# EAGLE board Cool Snaget-Lappi (EAGLE 9.7.0)

Size 135.71 x 119.64 mm. Coordinates in mm from the lower left corner, seen from the top.
Outline: 0,0 135.71,0 135.71,119.64 0,119.64 0,0
Copper layers (1*16): Top 0.035mm / dielectric 1.5mm / Bottom 0.035mm
Design rules "default": minimum track width 6mil, minimum drill 0.35mm, track to track 6mil, track to pad 6mil, pad to pad 6mil, via to via 6mil, smd to smd 6mil, copper to edge 40mil, drill to drill 6mil, minimum pad ring 10mil, minimum via ring 8mil, stop-mask expansion 4mil, vias tented up to drill 0mil, thermal gap 10mil

## Footprints (pad centres in the part's own frame; a part is rotated, then mirrored left to right if it is on the bottom)
LEDRD254W60D565H860B = drill 0.981 pad 1.581: 1 -1.27,0; 2 1.27,0
RESAD1016W63L850D250B = drill 0.83 pad 1.43: 1 -5.08,0; 2 5.08,0
SWITCH-MOMENTARY-PTH-6.5MM = drill 1.016 pad 1.88: 1 -3.251,2.261; 2 3.251,2.261; 3 -3.251,-2.261; 4 3.251,-2.261
ARDUINO-UNO-R3-SHIELD = drill 1.016 pad 1.88: 3.3V 24.13,-2.54; 5V 24.13,0; A0 24.13,12.7; A1 24.13,15.24; A2 24.13,17.78; A3 24.13,20.32; A4 24.13,22.86; A5 24.13,25.4; AREF -24.13,-13.97; D2 -24.13,20.32; D3 -24.13,17.78; D4 -24.13,15.24; D5 -24.13,12.7; D6 -24.13,10.16; D7 -24.13,7.62; D8 -24.13,3.81; D9 -24.13,1.27; D10 -24.13,-1.27; D11 -24.13,-3.81; D12 -24.13,-6.35; D13 -24.13,-8.89; GND@0 24.13,2.54; GND@1 24.13,5.08; GND@2 -24.13,-11.43; IOREF 24.13,-7.62; NC 24.13,-10.16; RES 24.13,-5.08; RX -24.13,25.4; SCL -24.13,-19.05; SDA -24.13,-16.51; TX -24.13,22.86; VIN 24.13,7.62

## Placement (x,y rotation side)
D3  RED  [LEDRD254W60D565H860B]  107.79,111.73 180 top
D5  RED  [LEDRD254W60D565H860B]  117.95,111.73 180 top
D6  RED  [LEDRD254W60D565H860B]  128.11,111.73 180 top
R1  10k  [RESAD1016W63L850D250B]  65.88,96.49 0 top
R3  10k  [RESAD1016W63L850D250B]  78.58,93.95 0 top
R6  10k  [RESAD1016W63L850D250B]  91.28,96.49 0 top
R7  220  [RESAD1016W63L850D250B]  129.38,104.11 90 top
R8  220  [RESAD1016W63L850D250B]  119.22,104.11 90 top
R9  220  [RESAD1016W63L850D250B]  109.06,104.11 90 top
S1  SWITCH_MOMENTARY  [SWITCH-MOMENTARY-PTH-6.5MM]  58.26,105.38 90 top
S2  SWITCH_MOMENTARY  [SWITCH-MOMENTARY-PTH-6.5MM]  70.96,105.38 90 top
S4  SWITCH_MOMENTARY  [SWITCH-MOMENTARY-PTH-6.5MM]  83.66,105.38 90 top
U2  ARDUINO-UNO-R3-SHIELD  [ARDUINO-UNO-R3-SHIELD]  47.88,29.84 270 top

## Library data of the parts
D3 D5 D6 = Tinkercad; CATEGORY: Opto-Electronic; SUB-CATEGORY: LED; VALUE: LED_RED
R1 R3 R6-R9 S1 S2 S4 U2 = Tinkercad

## Nets
D3_A: D3.1 R9.2
D5_A: D5.1 R8.2
D6_A: D6.1 R7.2
U2_5V: S1.1 S1.2 S2.1 S2.2 S4.1 S4.2 U2.5V
U2_D2: R6.1 S4.3 S4.4 U2.D2
U2_D3: R3.1 S2.3 S2.4 U2.D3
U2_D4: R1.1 S1.3 S1.4 U2.D4
U2_D8: R7.1 U2.D8
U2_D9: R8.1 U2.D9
U2_D10: R9.1 U2.D10
U2_GND: D3.2 D5.2 D6.2 R1.2 R3.2 R6.2 U2.GND@0 U2.GND@1 U2.GND@2

## Tracks (layer width: path | path; a pad name or v marks a point on that pad's centre or on a via)
D3_A  (1 unrouted)
D5_A  (1 unrouted)
D6_A  (1 unrouted)
U2_5V  (6 unrouted)
U2_D2  (3 unrouted)
U2_D3  (3 unrouted)
U2_D4  (3 unrouted)
U2_D8  (1 unrouted)
U2_D9  (1 unrouted)
U2_D10  (1 unrouted)
U2_GND  (8 unrouted)